# Altium PCB UltiController.PcbDoc
Units mm, origin at the board's own origin, x right, y up, seen from the top; angles counter-clockwise.
Board outline 170 x 47 mm, 2 copper layers (Top Layer, Bottom Layer), stack 1.586 mm thick; 131 components, 59 nets, 326 pads, 147 vias.
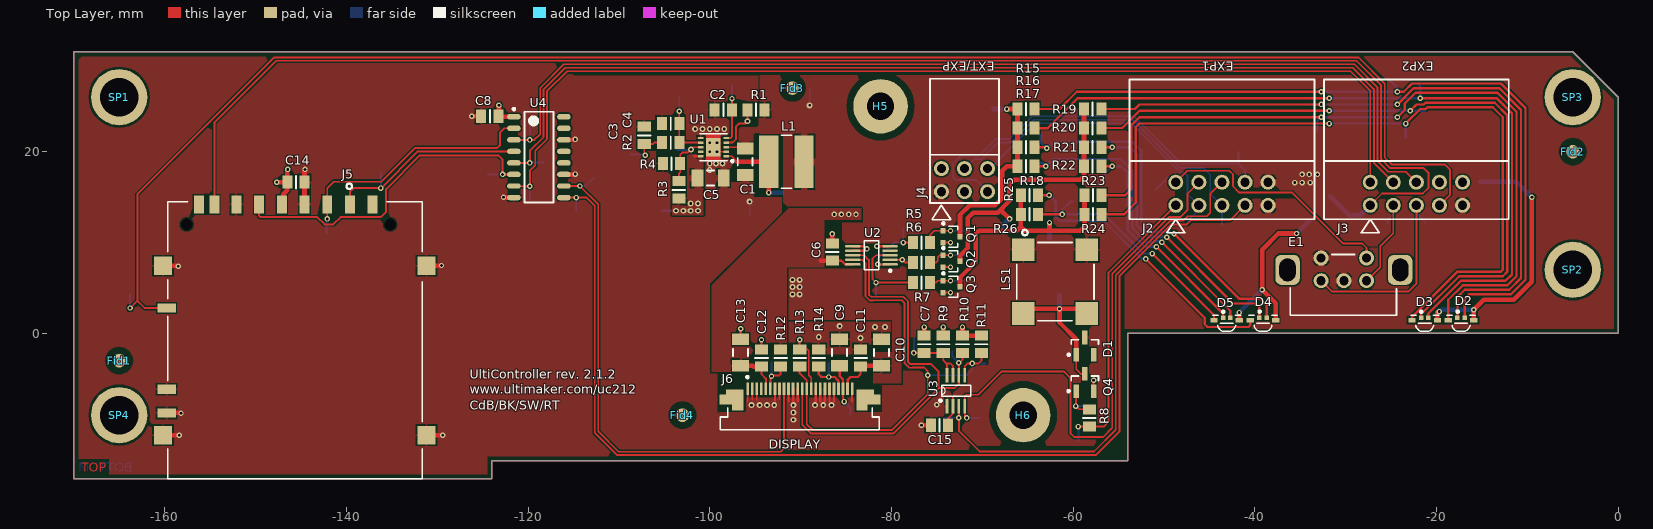
[diagram p0: Top Layer view]
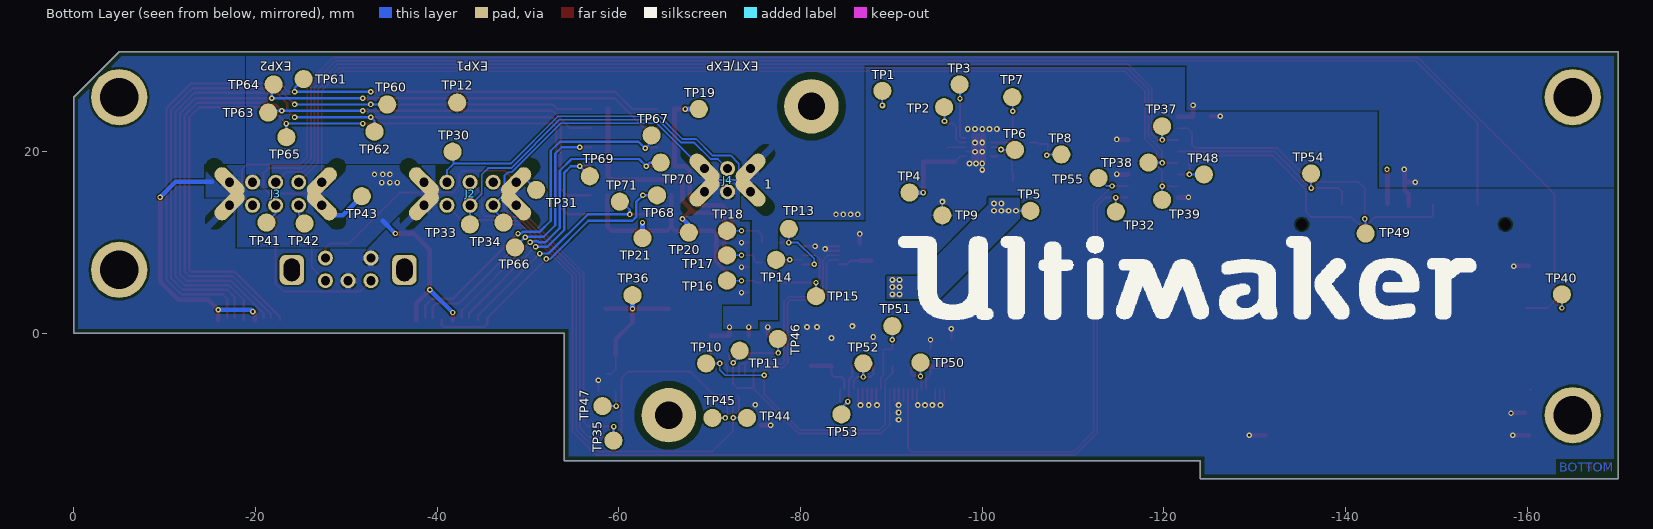
[diagram p1: Bottom Layer view, seen from below]
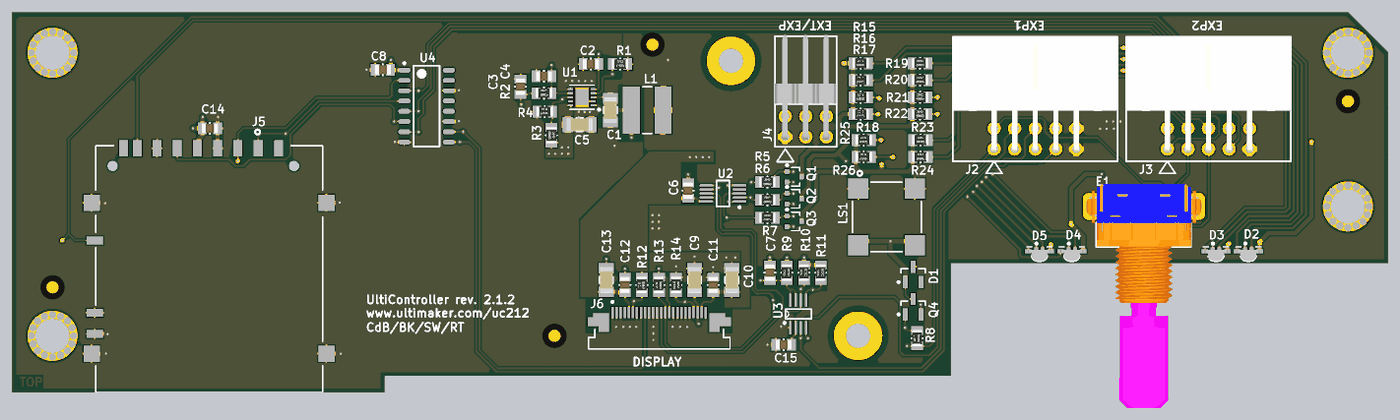
[diagram p2: 3D render of the assembled board from above, using the file's embedded part models]

## Layer stack, top to bottom
Top Layer: signal copper 0.018
Dielectric: core 1.55, FR-4, Dk 4.8
Bottom Layer: signal copper 0.018

## Board outline
-170,-16 -170,31 -5,31 0,26 0,0 -54,0 -54,-14 -124,-14 -124,-16

## Design rules (kind name [scope] priority, off if disabled: settings)
AssemblyTestPointUsage [All] p1 off:
AssemblyTestpoint [All] p1: testpointundercomponent=FALSE minsize=1.016 maxsize=2.54 preferedsize=1.524 minholesize=0 maxholesize=1.016 preferedholesize=0.813 testpointgrid=0.025 usegrid=TRUE gridtolerance=0 allowsidetop=TRUE allowsidebottom=TRUE
Clearance "Clearance spacers" [(InComponent('SP1')) or (InComponent('SP2'))  or (InComponent('SP3')) or (InComponent('SP4'))] p1: gap=0.254
Clearance "Clearance fiduals" [(InComponent('Fid1'))or (InComponent('Fid2'))or  (InComponent('Fid3'))or  (InComponent('Fid4'))] p2: gap=0.762
Clearance "Clearance mounting holes" [(InComponent('H5')) or (InComponent('H6'))] p3: gap=0.762
Clearance Clearance-xPP-xTP-xTT [All] p4: gap=0.178
ComponentClearance [All] p1: gap=0.25 collisioncheckmode=3 verticalgap=0.25 showdistances=FALSE
DiffPairsRouting [All] p1: maxlimit=0.25 minlimit=0.25 mostfreqgap=0.25 maxuncoupledlength=12.5
FabricationTestPointUsage [All] p1 off: valid=0 allowmultiple=FALSE
Height [All] p1: minheight=0 maxheight=25 prefheight=12.5
HoleSize HoleSize-PTH [All] p1: absolutevalues=TRUE maxlimit=4.3 minlimit=0.25 maxpercent=80.000 minpercent=20.000
HoleToHoleClearance [All] p1: gap=0.15 allowstackedmicrovias=TRUE
MinimumAnnularRing "Minimum IAR  >0.45mm" [((ObjectKind = 'Pad') OR (ObjectKind = 'Via')) And (Layer = 'MultiLayer') And (HoleDiameter > AsMM(0.45))] p1: minimumring=0.25 // minimum inner annular ring for pads > 0.45mm finished hole size
MinimumAnnularRing "Minimum IAR <=0.45mm" [((ObjectKind = 'Pad') OR (ObjectKind = 'Via')) And (Layer = 'MultiLayer') And (HoleDiameter <= AsMM(0.45))] p2: minimumring=0.225 // minimum inner annular ring for pads <= 0.45mm finished hole size
MinimumSolderMaskSliver [All] p1: minsoldermaskwidth=0.1
PlaneClearance PlaneClearance-IPI [All] p1: clearance=0.4
PlaneConnect [All] p1: planeconnectstyle=Relief reliefexpansion=0.4 reliefentries=4 reliefconductorwidth=0.2 reliefairgap=0.2
PolygonConnect "PolygonConnect_ReliefConnect 20mil" [(InComponent('L1'))or (InComponent('C1'))or (InComponent('C5')) or (InComponent('J1'))or(InComponent('J2'))or (InComponent('J3'))or (InComponent('J4'))or (InComponent('E1'))] p1: connectstyle=Relief reliefconductorwidth=0.762 reliefentries=4 polygonreliefangle="90 Angle"
PolygonConnect PolygonConnect_Via [IsVia] p2: connectstyle=Direct reliefconductorwidth=0.254 reliefentries=4 polygonreliefangle="90 Angle"
PolygonConnect PolygonConnect-ReliefConnect [All] p3: connectstyle=Relief reliefconductorwidth=0.2 reliefentries=4 polygonreliefangle="90 Angle"
RoomDefinition Sheet2 [InComponentClass('Sheet2')] p1 off: confinementstyle=ConfineIn formatcopy=TRUE lockcomponents=FALSE outline 101.099,3.499 105.799,3.499 105.799,8.399 101.099,8.399
RoomDefinition Sheet1 [InComponentClass('Sheet1')] p2 off: confinementstyle=ConfineIn formatcopy=TRUE lockcomponents=FALSE outline 101.099,3.499 158.099,3.499 158.099,12.599 101.099,12.599
RoutingCorners [All] p1: cornerstyle=45-Degree minsetback=2.5 maxsetback=2.5
RoutingVias [All] p1: holewidth=0.3 width=0.6 viastyle="Through Hole" minholewidth=0.3 minwidth=0.6 maxholewidth=0.3 maxwidth=0.6
SilkToSilkClearance [All] p1: silktosilkclearance=0.2
SilkscreenOverComponentPads [IsPad] p1: minsilkscreentomaskgap=0.2
SolderMaskExpansion [All] p1: expansion=0.1
Width Width-xTW [All] p1: maxlimit=1.5 minlimit=0.15 preferedwidth=0.2
14 further rules are at their usual default settings.

## Classes and differential pairs
component class Sheet2: C7 C8 C9 C10 C11 C12 C13 C14 C15 D1 E1 J2 J3 J4 J5 J6 LS1 Q4 R8 R9 R10 R11 R12 R13 R14 TP30 TP31 TP32 TP33 TP34 TP35 TP36 TP37 TP38 TP39 TP40 TP41 TP42 TP43 TP44 TP45 TP46 TP47 TP48 TP49 TP50 TP51 TP52 TP53 TP54 TP55 U3 U4
component class Sheet1: C1 C2 C3 C4 C5 C6 D2 D3 D4 D5 Fid1 Fid2 Fid3 Fid4 H2 H5 H6 L1 Q1 Q2 Q3 R1 R2 R3 R4 R5 R6 R7 R15 R16 R17 R18 R19 R20 R21 R22 R23 R24 R25 R26 SP1 SP2 SP3 SP4 TP1 TP2 TP3 TP4 TP5 TP6 TP7 TP8 TP9 TP10 TP11 TP12 TP13 TP14 TP15 TP16 TP17 TP18 TP19 TP20 TP21 TP60 TP61 TP62 TP63 TP64 TP65 TP66 TP67 TP68 TP69 TP70 TP71 U1 U2

## Components (designator, comment, footprint, x,y, rotation, side; value= is the part's Value field where it differs from the comment)
C1 "4.7uF" "C1206 (3216)" -96.1,18.9 r90 top
C2 "10nF" "C0805 (2012)" -98.5,24.6 r0 top
C3 "2.2nF" "C0805 (2012)" -107.2,21.8 r270 top
C4 "15pF" "C0805 (2012)" -104.3,23.1 r0 top
C5 "10uF" "C1206 (3216)" -99.9,17.1 r180 top
C6 "100nF" "C0805 (2012)" -86.5,8.95 r90 top
C7 "10nF" "C0805 (2012)" -76.4,-1.2 r270 top
C8 "100nF" "C0805 (2012)" -124.2,23.9 r0 top
C9 "4.7uF" "C1206 (3216)" -85.7,-2.1 r90 top
C10 "10uF" "C1206 (3216)" -81.1,-2.1 r270 top
C11 "100nF" "C0805 (2012)" -83.4,-2.7 r270 top
C12 "100nF" "C0805 (2012)" -94.3,-2.7 r270 top
C13 "4.7uF" "C1206 (3216)" -96.6,-2.1 r90 top
C14 "100nF" "C0805 (2012)" -145.55,16.65 r180 top
C15 "100nF" "C0805 (2012)" -74.7,-10.1 r0 top
D1 "BAS16" "IC SOT23" -58.7,-1.4 r90 top
D2 "LED 598-8810-307F" "LED SMD  598-8810-307F" -17.7,1.7 r180 top
D3 "LED 598-8810-307F" "LED SMD  598-8810-307F" -21.7,1.7 r180 top
D4 "LED 598-8810-307F" "LED SMD  598-8810-307F" -39.5,1.7 r180 top
D5 "LED 598-8810-307F" "LED SMD  598-8810-307F" -43.5,1.7 r180 top
E1 "EC11B15242AE" "MISC EC11B15242AE" -32.7,5.8 r270 top locked
Fid1 "Fiducial" "FIDUCIAL 1,5MM"#1 -162,-3 r180 top
Fid2 "Fiducial" "FIDUCIAL 1,5MM"#2 -5,20 r270 top
Fid3 "Fiducial" "FIDUCIAL 1,5MM"#2 -90.9,27 r270 top
Fid4 "Fiducial" "FIDUCIAL 1,5MM"#2 -103,-9 r270 top
H5 "3mm" "MOUNTING HOLE 3MM PTH" -81.2,25 r90 top
H6 "3mm" "MOUNTING HOLE 3MM PTH" -65.5,-9 r0 top
J2 "10p" "HEADER 10P RIGHT ANGLE" -48.7,14.1 r0 top locked
J3 "10p" "HEADER 10P RIGHT ANGLE" -27.3,14.1 r0 top locked
J4 "6p" "HEADER 6P RIGHT ANGLE" -74.5,15.6 r0 top
J5 "SD Memory Card connector" "CON SD-CARD" -139.6,14.2 r0 top locked
J6 "SFV24R-1STE9LF" "CON SFV24R-1STE9LF" -95.823,-6.1 r0 top
L1 "4.7uH" "INDUCTOR MCSDC0604" -89.6,18.9 r90 top
LS1 "KSSGJ4B20" "BUZZER KSSGJ4B20" -65.5,9.2 r270 top
Q1 "PBSS4140U" "IC SOT323" -74.3,11.3 r180 top
Q2 "PBSS4140U" "IC SOT323" -74.3,8.6 r180 top
Q3 "PBSS4140U" "IC SOT323" -74.3,5.8 r180 top
Q4 "MMBT3904" "IC SOT23" -58.7,-5.4 r90 top
R1 "10K" "R0805 (2012)" -94.9,24.6 r0 top
R2 "46.4K" "R0805 (2012)" -104.3,21 r0 top
R3 "191K" "R0805 (2012)" -103.4,15.8 r270 top
R4 "20.5K" "R0805 (2012)" -104.2,18.7 r0 top
R5 "330E" "R0805 (2012)" -76.7,10 r0 top
R6 "330E" "R0805 (2012)" -76.7,7.8 r0 top
R7 "330E" "R0805 (2012)" -76.7,5.6 r0 top
R8 "330E" "R0805 (2012)" -58.2,-9.3 r90 top
R9 "191K" "R0805 (2012)" -74.3,-1.2 r90 top
R10 "4.7K" "R0805 (2012)" -72.175,-1.2 r90 top
R11 "4.7K" "R0805 (2012)" -70.1,-1.2 r90 top
R12 "10K" "R0805 (2012)" -92.2,-2.7 r90 top
R13 "0E" "R0805 (2012)" -90.1,-2.7 r90 top
R14 "1M" "R0805 (2012)" -88,-2.7 r270 top
R15 "150E" "R0805 (2012)" -65.178,24.697 r0 top
R16 "150E" "R0805 (2012)" -65.178,22.597 r0 top
R17 "150E" "R0805 (2012)" -65.178,20.497 r0 top
R18 "150E" "R0805 (2012)" -65.178,18.397 r0 top
R19 "100E" "R0805 (2012)" -57.85,24.7 r0 top
R20 "100E" "R0805 (2012)" -57.85,22.6 r0 top
R21 "100E" "R0805 (2012)" -57.85,20.5 r0 top
R22 "100E" "R0805 (2012)" -57.85,18.4 r0 top
R23 "100E" "R0805 (2012)" -57.8,15.2 r0 top
R24 "100E" "R0805 (2012)" -57.8,13.1 r0 top
R25 "100E" "R0805 (2012)" -64.8,15.2 r0 top
R26 "100E" "R0805 (2012)" -64.8,13.1 r0 top
SP1 "M3-10ET" "SPACER M3-10ET" -165,26 r0 top locked
SP2 "M3-10ET" "SPACER M3-10ET" -5,7 r0 top locked
SP3 "M3-10ET" "SPACER M3-10ET" -5,26 r0 top locked
SP4 "M3-10ET" "SPACER M3-10ET" -165,-9 r0 top locked
TP1 "2mm" "TESTPOINT 2MM" -89,26.7 r270 bottom
TP2 "2mm" "TESTPOINT 2MM" -95.8,24.9 r90 bottom
TP3 "2mm" "TESTPOINT 2MM" -97.5,27.4 r90 bottom
TP4 "2mm" "TESTPOINT 2MM" -92,15.5 r90 bottom
TP5 "2mm" "TESTPOINT 2MM" -105.3,13.5 r90 bottom
TP6 "2mm" "TESTPOINT 2MM" -103.6,20.2 r90 bottom
TP7 "2mm" "TESTPOINT 2MM" -103.3,26 r90 bottom
TP8 "2mm" "TESTPOINT 2MM" -108.7,19.7 r90 bottom
TP9 "2mm" "TESTPOINT 2MM" -95.6,13 r0 bottom
TP10 "2mm" "TESTPOINT 2MM" -69.6,-3.3 r90 bottom
TP11 "2mm" "TESTPOINT 2MM" -73.3,-1.9 r90 bottom
TP12 "2mm" "TESTPOINT 2MM" -42.2,25.4 r90 bottom
TP13 "2mm" "TESTPOINT 2MM" -78.7,11.5 r90 bottom
TP14 "2mm" "TESTPOINT 2MM" -77.3,8.1 r90 bottom
TP15 "2mm" "TESTPOINT 2MM" -81.7,4.1 r90 bottom
TP16 "2mm" "TESTPOINT 2MM" -71.9,5.8 r90 bottom
TP17 "2mm" "TESTPOINT 2MM" -71.9,8.6 r90 bottom
TP18 "2mm" "TESTPOINT 2MM" -71.9,11.3 r90 bottom
TP19 "2mm" "TESTPOINT 2MM" -68.8,24.7 r90 bottom
TP20 "2mm" "TESTPOINT 2MM" -67.7,11.1 r90 bottom
TP21 "2mm" "TESTPOINT 2MM" -62.6,10.5 r90 bottom
TP30 "2mm" "TESTPOINT 2MM" -41.7,20 r90 bottom
TP31 "2mm" "TESTPOINT 2MM" -50.9,15.8 r0 bottom
TP32 "2mm" "TESTPOINT 2MM" -114.7,13.4 r90 bottom
TP33 "2mm" "TESTPOINT 2MM" -43.6,12 r90 bottom
TP34 "2mm" "TESTPOINT 2MM" -47.3,12.2 r90 bottom
TP35 "2mm" "TESTPOINT 2MM" -59.4,-11.8 r0 bottom
TP36 "2mm" "TESTPOINT 2MM" -61.5,4.2 r90 bottom
TP37 "2mm" "TESTPOINT 2MM" -119.8,22.8 r90 bottom
TP38 "2mm" "TESTPOINT 2MM" -118.3,18.8 r90 bottom
TP39 "2mm" "TESTPOINT 2MM" -119.8,14.7 r90 bottom
TP40 "2mm" "TESTPOINT 2MM" -163.8,4.3 r90 bottom
TP41 "2mm" "TESTPOINT 2MM" -21.2,12.2 r0 bottom
TP42 "2mm" "TESTPOINT 2MM" -25.4,12.1 r0 bottom
TP43 "2mm" "TESTPOINT 2MM" -31.7,15.1 r90 bottom
TP44 "2mm" "TESTPOINT 2MM" -74.1,-9.3 r0 bottom
TP45 "2mm" "TESTPOINT 2MM" -70.3,-9.3 r0 bottom
TP46 "2mm" "TESTPOINT 2MM" -77.5,-0.6 r90 bottom
TP47 "2mm" "TESTPOINT 2MM" -58.2,-8 r90 bottom
TP48 "2mm" "TESTPOINT 2MM" -124.4,17.5 r90 bottom
TP49 "2mm" "TESTPOINT 2MM" -142.2,11 r90 bottom
TP50 "2mm" "TESTPOINT 2MM" -93.2,-3.2 r90 bottom
TP51 "2mm" "TESTPOINT 2MM" -90.1,0.8 r90 bottom
TP52 "2mm" "TESTPOINT 2MM" -86.9,-3.3 r90 bottom
TP53 "2mm" "TESTPOINT 2MM" -84.5,-8.9 r90 bottom
TP54 "2mm" "TESTPOINT 2mm" -136.2,17.6 r270 bottom
TP55 "2mm" "TESTPOINT 2mm" -112.8,17.1 r270 bottom
TP60 "2mm" "TESTPOINT 2mm" -34.5,25.2 r270 bottom
TP61 "2mm" "TESTPOINT 2mm" -25.3,28 r270 bottom
TP62 "2mm" "TESTPOINT 2mm" -33.1,22.2 r270 bottom
TP63 "2mm" "TESTPOINT 2mm" -21.4,24.3 r270 bottom
TP64 "2mm" "TESTPOINT 2mm" -22,27.4 r270 bottom
TP65 "2mm" "TESTPOINT 2mm" -23.4,21.6 r270 bottom
TP66 "2mm" "TESTPOINT 2mm" -48.563,9.463 r270 bottom
TP67 "2mm" "TESTPOINT 2mm" -63.6,21.8 r270 bottom
TP68 "2mm" "TESTPOINT 2mm" -64.2,15.2 r270 bottom
TP69 "2mm" "TESTPOINT 2mm" -56.8,17.3 r270 bottom
TP70 "2mm" "TESTPOINT 2mm" -64.6,18.8 r270 bottom
TP71 "2mm" "TESTPOINT 2mm" -60.1,14.5 r270 bottom
U1 "IC LM4510SD/NOPB" "IC SDA10A" -98.2,19.5 r90 top
U2 "PCA9632DP2" "IC TSSOP-10" -82.2,8.6 r180 top
U3 "PCA9306" "IC SSOP-8" -73.875,-8 r0 top
U4 "74HC4050D" "IC SOIC-16" -118.8,19.4 r0 top

## Footprints (in the part's own frame and the unit in brackets; to place one, negate y for a bottom-side part, rotate by r counter-clockwise, add the part's x,y. Pads: shape width x height; smd on the part's side, far side on the other; paste and mask are expansions set on the pad)
"BUZZER KSSGJ4B20" [mm] "Buzzer KSSGJ4B20 SMD"
  rect 2.5x2.5 smd: 1(0,0) 2(0,7) 3(7,7) 4(7,0)
  silkscreen extent -2.2,-0.7 7.8,7.8, body extent -0.75,-0.7 7.75,7.8, height 3.2
"C0805 (2012)" [mm] "hip Capacitor, 2-Leads, Body 2,0x1.25mm, IPC Medium Density"
  rect 1.1x1.45 smd: 1(-0.95,0) 2(0.95,0)
  silkscreen extent 0,-0.7 0,0.7, body extent -1,-0.6 1,0.6, height 1.19
"C1206 (3216)" [mm] "Chip Capacitor, 2-Leads, Body 3.2x1.6mm, IPC Medium Density"
  rect 1.3x1.85 smd: 1(-1.45,0) 2(1.45,0)
  silkscreen extent -0.4,-0.82 0.4,0.82, body extent -1.6,-0.8 1.6,0.8, height 0.77
"CON SD-CARD" [mm] "Std,reverse SD Memory Card connector SMD"
  round 0 hole 1.3 unplated: 0(-17.975,-2.2) 0(4.425,-2.2)
  rect 1.1x2 smd: 1(0,0) 2(-2.5,0) 3(-5,0) 4(-7.5,0) 5(-10,0) 6(-12.5,0) 7(-14.925,0) 8(-16.625,0) 9(2.5,0)
  rect 2x1 smd: 10(-20.175,-11.4) 11(-20.175,-20.35) 12(-20.175,-22.95)
  rect 2x2 smd: A(8.425,-6.75) B(8.425,-25.4) C(-20.575,-6.75) D(-20.575,-25.4)
  silkscreen extent -20.05,-30.2 7.95,2.3, body extent -20.05,-30.2 7.95,0.3, height 2.9
"CON SFV24R-1STE9LF" [mm] "Connnector SFV24R-1STE9LF 24 pins SMD"
  rect 0.7x1.1 smd: 0(-2.75,-1.15) 0(14.25,-1.15)
  rect 1.95x1.6 smd: 0(-1.43,-0.9) 0(12.93,-0.9)
  rect 1.25x0.7 smd: 0(-1.08,-2.05) 0(12.58,-2.05)
  rect 0.3x1.4 smd: 1(0,0) 2(0.5,0) 3(1,0) 4(1.5,0) 5(2,0) 6(2.5,0) 7(3,0) 8(3.5,0) 9(4,0) 10(4.5,0) 11(5,0) 12(5.5,0) 13(6,0) 14(6.5,0) 15(7,0) 16(7.5,0) 17(8,0) 18(8.5,0) 19(9,0) 20(9.5,0) 21(10,0) 22(10.5,0) 23(11,0) 24(11.5,0)
  silkscreen extent -3,-4.5 14.5,1.42, body extent -3,-4.5 14.5,-0.3, height 1.8
"FIDUCIAL 1,5MM"#1 [mm] "Fiducial 1,5mm"
  round 1.5 smd paste-3 mask+0.75: ""(3,0)
"FIDUCIAL 1,5MM"#2 [mm] "Fiducial 1,5mm"
  round 1.5 smd paste-3 mask+0.75: ""(0,0)
"HEADER 6P RIGHT ANGLE" [mm] "Header 2x3p right angle 2.54mm"
  round 1.65 hole 1.02: 1(0,0) 2(0,2.54) 3(2.54,0) 4(2.54,2.54) 5(5.08,0) 6(5.08,2.54)
  oval 1.65x4 smd far side rot 135 paste-2 mask+0: 1(0,0) 6(5.08,2.54)
  oval 1.65x4 smd far side rot 45 paste-2 mask+0: 2(0,2.54) 5(5.08,0)
  silkscreen extent -1.27,-3.08 6.35,12.44, body extent -1.31,-0.28 6.31,12.6, height 5
"HEADER 10P RIGHT ANGLE" [mm] "Header 2x5p right angle 2.54mm"
  round 1.65 hole 1.02: 1(0,0) 2(0,2.54) 3(2.54,0) 4(2.54,2.54) 5(5.08,0) 6(5.08,2.54) 7(7.62,0) 8(7.62,2.54) 9(10.16,0) 10(10.16,2.54)
  oval 1.65x4 smd far side rot 135 paste-2 mask+0: 1(0,0) 10(10.16,2.54)
  oval 1.65x4 smd far side rot 45 paste-2 mask+0: 2(0,2.54) 9(10.16,0)
  silkscreen extent -5.09,-3.02 15.26,13.86, body extent -5.08,-0.32 15.24,13.86, height 8.8
"IC SDA10A" [mm] "SON- 10-Leads, Body 3x3mm, Pitch 0.5mm"
  rect 0.25x0.6 smd paste+0: 1(0,0) 2(0.5,0) 3(1,0) 4(1.5,0) 5(2,0) 6(2,2.8) 7(1.5,2.8) 8(1,2.8) 9(0.5,2.8) 10(0,2.8)
  rect 2x1.6 smd paste+0: 11(1,1.4)
  silkscreen extent -0.65,-0.83 2.5,2.9, body extent -0.5,-0.1 2.5,2.9, height 0.8
"IC SOIC-16" [mm] "SOIC, 16-Leads, Body 9.9x3.9mm, Pitch 1.27mm, IPC Medium Density"
  oval 1.5x0.6 smd: 1(-2.75,4.445) 2(-2.75,3.175) 3(-2.75,1.905) 4(-2.75,0.635) 5(-2.75,-0.635) 6(-2.75,-1.905) 7(-2.75,-3.175) 8(-2.75,-4.445) 9(2.75,-4.445) 10(2.75,-3.175) 11(2.75,-1.905) 12(2.75,-0.635) 13(2.75,0.635) 14(2.75,1.905) 15(2.75,3.175) 16(2.75,4.445)
  silkscreen extent -2.87,-5 1.6,5.42, body extent -2,-5 2,5, height 1.73
"IC SOT23" [mm] "SOT23, 3-Leads, Body 2.9x1.3mm, Pitch 0.95mm, Lead Span 2.5mm, IPC Medium Density"
  rect 1.5x0.6 smd: 1(-0.95,0.95) 2(-0.95,-0.95) 3(0.95,0)
  silkscreen extent -1.07,-1.5 0.7,1.92, body extent -0.7,-1.5 0.7,1.5, height 1.1
"IC SOT323" [mm] "IC SOT323"
  rect 0.55x0.6 smd paste+0: 1(0,0) 2(0,1.3) 3(-1.85,0.65)
  silkscreen extent -1.6,-0.92 0.1,1.8, body extent -1.6,-0.5 -0.2,1.8, height 1.1
"IC SSOP-8" [mm] "IC SSOP-8 SMD"
  rect 0.3x1.6 smd paste+0: 1(0,0) 2(0.65,0) 3(1.3,0) 4(1.95,0) 5(1.95,3.4) 6(1.3,3.4) 7(0.65,3.4) 8(0,3.4)
  silkscreen extent -0.85,0.48 2.6,2.3, body extent -0.6,0.3 2.6,3.2, height 1.3
"IC TSSOP-10" [mm] "TSSOP, 10-Leads, Body 3x3mm, Pitch 0.5mm, IPC Medium Density"
  oval 1.7x0.3 smd: 1(-2.05,1) 2(-2.05,0.5) 3(-2.05,0) 4(-2.05,-0.5) 5(-2.05,-1) 6(2.05,-1) 7(2.05,-0.5) 8(2.05,0) 9(2.05,0.5) 10(2.05,1)
  silkscreen extent -2.17,-1.6 0.8,1.82, body extent -1.6,-1.6 1.6,1.6, height 1.1
"INDUCTOR MCSDC0604" [mm] "Inductor MCSDC0604"
  rect 5.8x2.1 smd paste+0: 1(0,0) 2(0,3.9)
  silkscreen extent -2.9,1.4 2.9,2.5, body extent -2.9,-1 2.9,4.9, height 1.8
"LED SMD  598-8810-307F" [mm] "LED tricolor SMD"
  rect 0.5x0.5 smd: 1(0,0) 2(-0.8,0)
  rect 0.8x0.5 smd: 3(1,0.25) 4(-1.8,0.25)
  silkscreen extent -1.95,-0.82 1.15,1.48, body extent -2,0.05 1.2,1.46, height 0.99
"MISC EC11B15242AE" [mm] "Misc EC11B15242AE encoder"
  rrect50% 3.3x2.7 hole 1.8 slot 2.5 at 0 deg: 0(-1.2,8.7) 0(-1.2,-3.7)
  round 1.65 hole 1: A(0,0) B(0,5) C(0,2.5) D(-2.5,0) E(-2.5,5)
  silkscreen extent -2.9,-3.4 3.8,8.3, body extent -4,-4.55 23.75,9.55, height 13.79
"MOUNTING HOLE 3MM PTH" [mm] "Mounting Hole 3mm PTH"
  round 6 hole 3: 0(0,0)
"R0805 (2012)" [mm] "hip Resistor, 2-Leads, Body 2,0x1.25mm, IPC Medium Density"
  rect 1.1x1.45 smd: 1(-0.95,0) 2(0.95,0)
  silkscreen extent 0,-0.7 0,0.7, body extent -1,-0.6 1,0.65, height 0.44
"SPACER M3-10ET" [mm] "Spacer M3-10ET"
  round 6.2 hole 4.22: 0(0,0)
"TESTPOINT 2MM" [mm] "TESTPOINT 2mm"
  round 2 smd paste-2 mask+0: 1(0,0)
"TESTPOINT 2mm" [mm] "TESTPOINT 2mm"
  round 2 smd paste-2 mask+0: 1(0,0)

## Part data
C1 C9 C13: library part "Cap 4.7uF X7R 1206", "Cap 4.7uF 1206 X7R 10% 25V"
C2 C7: library part "Cap 10nF X7R 0805", "Cap 10nF X7R 0805 10% 100V"
C3: library part "Cap 2.2nF X7R 0805", "Cap 2.2nF X7R 0805 10% 100V"
C4: library part "Cap 15pF NPO 0805", "Cap 15pF NPO 0805 5% 100V"
C5 C10: library part "Cap 10uF X7R 1206", "Cap 10uF 1206 X7R 10% 25V"
C6 C8 C11 C12 C14 C15: library part "Cap 100nF X7R 0805", "Cap 100nF X7R 0805 10% 100V"
D1: library part "Diode BAS16", "Diode BAS16  SOT23 85V 215MA"
D2 D3 D4 D5: "LED MULTICOLOR RED/GRN/BLUE 1208"
E1: library part "Misc EC11B15242AE", "Misc EC11B15242AE encoder horiz"
H5 H6: "Mounting Hole 3mm PTH"
J2 J3: "Header 2x5p right angle 2.54mm"
J4: "Header 2x3p right angle 2.54mm"
J5: "Connector Std,reverse SD Memory Card connector"
J6: library part "Connector SFV24R-1STE9LF", "Connector FPC/FFC 0.5mm R/A 24p SMD"
L1: library part "Inductor 4.7uH SMD", "Inductor 4.7uH SMD"
LS1: library part "Buzzer KSSGJ4B20", "Buzzer KSSGJ4B20 SMD"
Q1 Q2 Q3: library part "NPN PBSS4140U", "NPN PBSS4140U SOT-323 1A"
Q4: library part "NPN MMBT3904", "NPN MMBT3904 SOT-23 200mA"
R1 R12: library part "Res 10K 0805", "Res 10K 0805 1% 100mW"
R2: library part "Res 46.4K 0805", "Res 46.4K 0805 1% 100mW"
R3 R9: library part "Res 191K 0805", "Res 191K 0805 1% 125mW"
R4: library part "Res 20.5K 0805", "Res 20.5K 0805 1% 100mW"
R5 R6 R7 R8: library part "Res 330E 0805", "Res 330E 0805 1% 100mW"
R10 R11: library part "Res 4.7K 0805", "Res 4.7K 0805 1% 100mW"
R13: library part "Res 0E 0805", "Res 0E 0805 1% 100mW"
R14: library part "Res 1M 0805", "Res 1M 0805 1% 100mW"
R15 R16 R17 R18: library part "Res 150E 0805", "Res 150E 0805 1% 125mW"
R19 R20 R21 R22 R23 R24 R25 R26: library part "Res 100E 0805", "Res 100E 0805 1% 125mW"
SP1 SP2 SP3 SP4: "Spacer SMTSO-M3-10ET"
TP1 TP2 TP3 TP4 TP5 TP6 TP7 TP8 TP9 TP10 TP11 TP12 TP13 TP14 TP15 TP16 TP17 TP18 TP19 TP20 TP21 TP30 TP31 TP32 TP33 TP34 TP35 TP36 TP37 TP38 TP39 TP40 TP41 TP42 TP43 TP44 TP45 TP46 TP47 TP48 TP49 TP50 TP51 TP52 TP53 TP54 TP55 TP60 TP61 TP62 TP63 TP64 TP65 TP66 TP67 TP68 TP69 TP70 TP71: "Testpoint, 2mm, round"
U1: "IC Synchronous Step-Up DC/DC Converter with True Shutdown Isolation, 10-pin LLP, Pb-Free"
U2: library part "IC PCA9632", "IC LED DRIVER RGBA"
U3: library part "IC PCA9306", "IC PCA9306 Voltage Level translator"
U4: library part "IC 74HC4050D", "IC Hex Non-Inverting Buffer/Logic-Level Down Converter"

## Via types
v1: diameter 0.6, hole 0.3, Top Layer to Bottom Layer, tented both sides, 76 vias
v2: diameter 0.65, hole 0.3, Top Layer to Bottom Layer, tented both sides, 40 vias
v3: diameter 0.6, hole 0.3, Top Layer to Bottom Layer, 27 vias
v4: diameter 0.65, hole 0.3, Top Layer to Bottom Layer, 4 vias

## Nets (pads, with @x,y where several pads share a name; then routed paths per layer and width w, separated by ;. In a path a pad name is that pad's centre, name@x,y a point inside that pad or via, vN(x,y) a via of type N, cw(c..) or ccw(c..) an arc to the next point about the centre after c; other vN are vias at no path point)
3.3V: C6.1 C8.2 C12.2 C13.1 C14.2 J3.8 J4.2 J5.4 J6.5 R9.2 R10.2 R11.2 R12.2 TP12.1 U2.10 U4.1 | length 21
  Top Layer w0.203: C12.2 -94.3,-4.5 -93.823,-4.977 J6.5
  Top Layer w0.254: C6.1@-86.45,7.95 C6.1 -85.493,8 -85.093,7.6 U2.10
  Top Layer w0.508: v1(-147.65,16.65) C14.2 ; J5.4@-146.95,14.05 -146.95,15.329 -146.5,15.779 C14.2 ; v1@-146.45,17.95 -146.5,17.9 C14.2 ; v1(-123.2,25.1) -123.2,23.95 C8.2 -123.195,23.845 U4.1 ; C13.1 -95.25,-3.55 -95.15,-3.65 C12.2 ; -87.8,8 C6.1 ; R9.2 v1(-74.3,0.7) ; v1(-72.175,0.7) R10.2 R11.2
  other v1: -86.3,13.1 -85.5,13.1 -84.7,13.1 -83.9,13.1 -146.45,18.05
5V: C1.2 C15.2 D1.3 D2.4 D3.4 D4.4 D5.4 J2.10 J3.10 J4.1 L1.1 LS1.1 LS1.2 R1.2 TP1.1 U1.3 U3.2 | length 56.6
  Top Layer w0.203: U1.3 -96.25,20.5 C1.2 ; C15.2 -73.75,-9.35 -73.225,-8.825 U3.2 -73.225,-7.025 -73,-6.8
  Top Layer w0.508: D5.4 v3(-41.7,2.3) ; D4.4 -37.7,3.3 v3(-39.2,4.8) -39.2,9.2 -37.4,11 v1(-35.4,11) ; D3.4 -19.9,2.3 -19.8,2.4 v3(-19.7,2.4) ; D2.4 v3(-15.9,2.6) -14.8,3.7 -11.5,3.7 -9.5,5.7 v3(-9.5,15)
  Bottom Layer w0.2: v2(-89,25.1) TP1.1@-89,26.9
  Bottom Layer w0.508: v3(-41.7,2.3) v3(-39.2,4.8) ; v1(-35.4,11) -34,12.4 ; v3(-19.7,2.4) -19.8,2.4 -19.6,2.6 v3(-15.9,2.6) ; -15.2,16.7 -11.2,16.7 v3(-9.5,15)
  other v1: -35.6,16.6 -34.8,16.6 -33.9,16.6 -34.8,17.5 -34,17.5 -33.1,17.5
13V: C5.2 C10.2 C11.2 J6.23 R3.2 TP5.1 U1.10 | length 8.1
  Top Layer w0.254: -101.7,19.5 U1.10 ; J6.23 -84.823,-5.123 -84.5,-4.8 -83.7,-4.8 -83.4,-4.5 C11.2
  Top Layer w0.508: C11.2 -83.3,-3.55 C10.2
  Bottom Layer w0.254: TP5.1 v2(-103.7,13.5)
  other v2: -90.9,4.3 -90.1,4.3 -90.9,5.1 -90.1,5.1 -90.9,5.9 -90.1,5.9 -102.9,13.5 -102.1,13.5 -101.3,13.5 -102.1,14.3 -101.3,14.3
BLUE1: D2.3 R23.2 TP62.1 | length 86.4
  Top Layer w0.254: R23.2 -54.3,15.2 -53.6,15.9 -53.6,22.9 -52.7,23.8 v3(-32.7,23.8) ; v3(-24.3,23.8) -23.5,24.6 -23.5,25.3 -22.295,26.505 -13.305,26.505 -11.2,24.4 -11.2,6.3 -12.2,5.3 -17.1,5.3 -18.7,3.7 D2.3
  Bottom Layer w0.254: TP62.1 -33.1,23.4 v3(-32.7,23.8) v3(-24.3,23.8)
BLUE2: D3.3 R24.2 TP65.1 | length 85.2
  Top Layer w0.254: R24.2 -54.4,13.1 -53.1,14.4 -53.1,22.7 -52.7,23.1 v3(-31.8,23.1) ; v3(-23.4,23.1) -21.8,24.7 -21.2,24.7 -21,24.9 -13.8,24.9 -12.7,23.8 -12.7,7 -12.9,6.8 -17.7,6.8 -22.7,1.8 D3.3
  Bottom Layer w0.254: v3(-31.8,23.1) v3(-23.4,23.1) TP65.1
BLUE3: D4.3 R25.2 TP68.1 | length 32.9
  Top Layer w0.254: R25.2 v3(-62.65,15.2) ; v1(-52,8.2) -45.5,1.7 -45.5,1 -45.2,0.7 -40.7,0.7 -40.5,0.9 D4.3
  Bottom Layer w0.254: TP68.1 v3(-62.65,15.2) -61.9,14.45 -61.9,12.8 -61.5,12.4 -56.639,12.4 -52.439,8.2 v1(-52,8.2)
BLUE4: D5.3 R26.2 TP71.1 | length 26.5
  Top Layer w0.254: R26.2 v3(-61.2,13.1) ; v1(-51.291,8.791) -44.5,2 D5.3
  Bottom Layer w0.254: TP71.1 -60.3,14.5 -61.2,13.6 v3(-61.2,13.1) -56.574,13.1 -52.265,8.791 -52.251,8.805 -51.305,8.805 v1(-51.291,8.791)
GND: C1.1 C2.1 C3.1 C4.1 C5.1 C6.2 C7.1 C8.1 C9.2 C10.1 C11.1 C12.1 C13.2 C14.1 C15.1 E1.C E1.D J2.9 J3.9 J4.3 J5.3 J5.6 J5.11 J5.12 J5.A J5.B J5.C J5.D J6.1 J6.2 J6.3 J6.7 J6.8 J6.10 J6.11 J6.12 J6.16 J6.17 J6.18 J6.19 J6.20 J6.24 Q1.2 Q2.2 Q3.2 Q4.2 R4.1 R14.1 TP9.1 U1.2 U1.6 U1.11 U2.5 U2.6 U2.7 U3.1 U4.8 U4.11 U4.14 | length 51.5
  Top Layer w0.203: U1.11@-99.1,20 U1.2 ; C13.2 v1(-96.6,0.5) ; -95.823,-7.477 J6.1 ; -95.323,-7.277 J6.2 ; -94.823,-7.323 J6.3 ; C12.1 v1(-94.3,-0.7) ; -92.823,-7.416 J6.7 ; -92.323,-7.223 J6.8 ; -84.323,-7.5 J6.24 ; Q3.2 v1(-73.5,4.5) ; Q2.2 v1(-73.5,7.3) ; Q1.2 v1(-73.5,10) ; Q4.2 v1(-57.75,-5.15)
  Top Layer w0.254: J5.11@-160.375,-6.15 J5.11@-160.325,-6.2 ; J5.12@-158.85,-8.75 J5.12@-158.8,-8.8 ; -91.323,-7.477 J6.10 ; -90.823,-7.477 J6.11 ; -90.323,-7.477 J6.12 ; -88.323,-7.477 J6.16 ; -87.823,-7.477 J6.17 ; -87.323,-7.477 J6.18 ; -86.823,-7.477 J6.19 ; -86.323,-7.477 J6.20 ; U2.7 -82.9,9.1 v1(-82.7,9.3) -83,9.6 U2.6 ; v1(-81.6,9.6) U2.5
  Top Layer w0.508: J5.D v1(-158.4,-11.2) ; J5.C -158.55,7.45 v1(-158.5,7.4) ; J5.12 v1@-158.25,-8.75 ; J5.3 C14.1 -144.6,17.8 v1@-144.55,17.85 ; J5.B v1(-129.4,-11.2) ; J5.A v1@-129.65,7.45 ; v1(-126.2,23.9) C8.1 ; v1(-122.7,15) -122.655,14.955 U4.8 ; U4.11 -114.845,17.495 v1(-114.8,17.54) ; U4.14 -114.845,21.305 v1(-114.8,21.35) ; C6.2 v1(-86.5,10.95) ; v1(-76.7,-10.1) C15.1 ; C7.1 v1(-76.4,0.7)
  Bottom Layer w0.203: TP9.1 v2(-95.6,14.5)
  other v1: -158.2,-8.8 -75.007,-7.857 -129.525,7.475 -144.55,18.05
  other v2: -90.8,-9.5 -90.8,-8.7 -95.4,-7.9 -94.5,-7.9 -93.7,-7.9 -92.9,-7.9 -90.8,-7.9 -88.4,-7.9 -87.5,-7.9 -86.6,-7.9 -83.4,-0.5 -88,-0.4 -81.8,0.7 -80.7,0.7 -85.7,0.8 -100,18 -100,18.7 -99.3,18.7 -98.6,18.7 -101.6,22.5 -100.8,22.5 -100,22.5 -99.2,22.5 -98.4,22.5
  other v4: -100,20 -99.2,20 -100,21 -99.2,21
GREEN1: D2.1 R19.2 TP60.1 | length 78.6
  Top Layer w0.254: R19.2 -53.2,24.7 -52.7,25.2 v3(-32.7,25.2) ; v3(-24.3,25.2) -22.5,27 -13.1,27 -10.7,24.6 -10.7,6.1 -12,4.8 -16.9,4.8 -17.7,4 D2.1
  Bottom Layer w0.254: TP60.1 v3(-32.7,25.2) v3(-24.3,25.2)
GREEN2: D3.1 R20.2 TP63.1 | length 77.1
  Top Layer w0.254: R20.2 -54.6,22.6 -52.7,24.5 v3(-31.8,24.5) ; v3(-22.9,24.5) -22.2,25.2 -21.4,25.2 -21.2,25.4 -13.6,25.4 -12.2,24 -12.2,6.8 -12.7,6.3 -17.5,6.3 -21.7,2.1 D3.1
  Bottom Layer w0.254: v3(-31.8,24.5) v3(-22.9,24.5) TP63.1@-21.3,24.5
GREEN3: D4.1 R21.2 TP66.1 | length 32.6
  Top Layer w0.254: R21.2 v3(-55.7,20.5) ; v1(-49.7,10.6) -42.4,3.3 -39.9,3.3 -39.5,2.9 D4.1
  Bottom Layer w0.254: v3(-55.7,20.5) -53.7,20.5 -53,19.8 -53,11.9 -51.73,10.63 -49.73,10.63 v1(-49.7,10.6) -48.3,9.2 TP66.1@-48.2,9.2
GREEN4: D5.1 R22.2 TP69.1 | length 25.9
  Top Layer w0.254: R22.2 v3(-55.7,18.4) ; v1(-50.831,9.531) -43.5,2.2 D5.1
  Bottom Layer w0.254: TP69.1 v3(-55.7,18.4) -54.7,18.4 -54,17.7 -54,11.4 -52.131,9.531 v1(-50.831,9.531)
J2_PIN5: J2.5 J4.4 TP33.1 | length 37.8
  Bottom Layer w0.203: J4.4 -70.9,19.2 -70.1,19.2 -68.3,21 -66.861,21 -64.342,23.519 -53.458,23.519 -48.139,18.2 -45.606,18.2 -44.9,17.494 -44.9,15.38 J2.5 -43.6,14.08 TP33.1
MISO: J3.1 J5.7 TP43.1 | length 170.7
  Top Layer w0.203: J5.7 -154.525,23.175 -147.693,30.007 -28.807,30.007 -26.1,27.3 -26.1,19.2 -25.1,18.2 -21.4,18.2 -20.9,17.7 -20.9,16 -21.5,15.4 -26,15.4 J3.1@-27.3,14.1
  Bottom Layer w0.203: J3.1@-28,14.1 -27.3,14.1 J3.1@-27.349,14.149
  Bottom Layer w0.508: TP43.1 -29.6,13 -28.4,13 J3.1@-27.3,14.1
MOSI: J3.6 TP37.1 U4.3 | length 117.4
  Top Layer w0.203: U4.3 -121.545,21.3 v1(-119.8,21.3) -119.3,21.3 -118.662,21.938 -118.662,27.016 -116.052,29.626 -29.026,29.626 -26.5,27.1 -26.5,19 -25.3,17.8 -23.38,17.8 J3.6
  Bottom Layer w0.203: v1(-119.8,21.3) TP37.1
NetC2_2: C2.2 TP3.1 U1.5 | length 6.4
  Top Layer w0.203: U1.5 -97.7,21.5 -97.553,21.647 -97.553,24.597 C2.2 v1(-97.55,25.85)
  Bottom Layer w0.203: v1(-97.55,25.85) TP3.1@-97.55,27.35
NetC3_2: C3.2 R2.1 TP8.1 | length 4.7
  Top Layer w0.203: v1@-107.2,19.7 C3.2 -106.25,20.85 -106.1,21 R2.1
  Bottom Layer w0.203: TP8.1 v1@-107.2,19.7
  other v1: -107.1,19.6
NetC4_2: C4.2 R2.2 TP7.1 U1.7 | length 7.4
  Top Layer w0.203: v1(-103.35,24.45) C4.2 R2.2 U1.7
  Bottom Layer w0.203: v1(-103.35,24.45) -103.35,25.95 TP7.1
NetC7_2: C7.2 R9.1 TP46.1 U3.7 U3.8 | length 9.2
  Top Layer w0.203: v1(-77.55,-2.15) C7.2 R9.1 -74.3,-2.975 -73.975,-3.3 -73.5,-3.3 -73.225,-3.575 U3.7 ; U3.8 -73.875,-3.4
  Bottom Layer w0.203: v1(-77.55,-2.15) -77.5,-2.1 TP46.1
NetC9_1: C9.1 J6.22 TP53.1 | length 5.8
  Top Layer w0.254: C9.1 -85.7,-4.7 -85.323,-5.077 J6.22 -85.323,-7.377 v1(-85.2,-7.5)
  Bottom Layer w0.254: v1(-85.2,-7.5) -84.5,-8.2 TP53.1
NetD1_1: D1.1 LS1.3 LS1.4 Q4.3 TP36.1 | length 17.1
  Top Layer w0.203: D1.1 -59.65,-3.95 -59.15,-4.45 Q4.3
  Top Layer w0.508: LS1.4@-65.5,2.7 v1(-61.5,2.7) ; D1.1 -59.65,-0.65 -61.5,1.2 v1(-61.5,2.7) ; LS1.3@-58.5,2.7 v1(-61.5,2.7)
  Bottom Layer w0.508: v1(-61.5,2.7) TP36.1
NetJ2_1: J2.1 R8.1 TP35.1 | length 32
  Top Layer w0.203: v1(-59.45,-10.25) R8.1 -56.65,-10.25 -56.106,-9.706 -56.106,6.694 J2.1@-48.7,14.1
  Bottom Layer w0.203: v1(-59.45,-10.25) -59.4,-10.3 TP35.1
NetJ2_3: J2.3 J4.6 TP34.1 | length 32.6
  Bottom Layer w0.203: J4.6@-69.42,18.14 -69.182,18.14 -64.184,23.138 -53.616,23.138 -48.224,17.747 -47.806,17.747 -47.4,17.341 -47.4,15.34 J2.3 -46.16,13.64 -47.3,12.5 TP34.1
NetJ2_8: J2.8 J4.5 TP30.1 | length 45.4
  Bottom Layer w0.203: J4.5@-69.42,15.6 -70.72,16.9 -72.9,16.9 -73.2,17.2 -73.2,18.7 -72.3,19.6 -70.3,19.6 -68.5,21.4 -67,21.4 -64.5,23.9 -53.3,23.9 -48.1,18.7 -41.8,18.7 ; TP30.1 -41.8,19.9 -41.8,18.7 ; J2.8 -41.08,17.98 -41.8,18.7
NetJ5_1: J5.1 TP54.1 U4.4 | length 22.9
  Top Layer w0.203: J5.1 -139.6,15.6 -139.2,16 v1(-136.2,16) -136.161,16 -132.126,20.035 U4.4
  Bottom Layer w0.203: v1(-136.2,16) TP54.1
NetJ5_2: J5.2 TP49.1 U4.2 | length 29.1
  Top Layer w0.203: v3(-142.1,12.6) J5.2 -142.1,16 -141.4,16.7 -136.147,16.7 -132.431,20.416 -123.384,20.416 -123.1,20.7 -123.1,22.1 -122.625,22.575 U4.2
  Bottom Layer w0.203: TP49.1 -142.2,12.5 v3(-142.1,12.6)
NetJ5_5: J5.5 TP48.1 U4.6 | length 37.7
  Top Layer w0.203: J5.5 -149.6,12.9 -149.5,12.8 -143.2,12.8 -142.4,12 -141.435,12 -140.635,12.8 -136.2,12.8 -135.621,13.379 -135.621,15.879 -131.9,19.6 -123.3,19.6 -122.8,19.1 v1(-122.8,17.5) -122.795,17.495 U4.6
  Bottom Layer w0.203: TP48.1 v1(-122.8,17.5)
NetJ6_6: J6.6 R12.1 TP50.1 | length 4.8
  Top Layer w0.203: J6.6 -93.323,-4.923 -93.03,-4.63 -92.33,-4.63 -92.2,-4.5 R12.1
  Bottom Layer w0.203: v1(-93.2,-4.7) TP50.1
NetJ6_9: J6.9 TP55.1 U4.10 | length 59.5
  Top Layer w0.203: U4.10 v1(-114.286,16.225) -112.269,14.208 -112.269,-10.792 -110.042,-13.019 -92.2,-13.019 -91.823,-12.642 J6.9
  Bottom Layer w0.203: v1(-114.286,16.225) -113.675,16.225 TP55.1
NetJ6_13: J6.13 R10.1 TP11.1 U2.8 U3.6 | length 51.8
  Top Layer w0.203: J6.13 -89.823,-10.077 -88.9,-11 -79.761,-11 -74.8,-6.039 -74.8,-6 ; U2.8 -83,8.6 -82.472,8.072 -82.472,4.272 -82.228,4.028 -78.688,4.028 -78.172,3.512 -78.172,-3.128 -77.928,-3.372 -75.628,-3.372 -74.8,-4.2 -74.8,-6 ; R10.1 -72.175,-2.875 -72.525,-3.225 v1(-72.575,-3.225) U3.6 -72.575,-5.575 -73,-6 -74.8,-6
  Bottom Layer w0.203: TP11.1 -73.3,-2.5 v1(-72.575,-3.225)
NetJ6_14: J6.14 R11.1 R13.1 TP10.1 U2.9 U3.5 | length 55
  Top Layer w0.203: R13.1 -90.1,-4.4 -89.323,-5.177 J6.14 -89.323,-9.977 -88.681,-10.619 -79.918,-10.619 -76,-6.701 v1(-76,-4.6) -76,-4.153 -76.4,-3.753 -77.714,-3.753 -77.742,-3.781 -78.058,-3.781 -78.553,-3.286 -78.553,3.314 -78.886,3.647 -82.014,3.647 -82.042,3.619 -82.358,3.619 -82.853,4.114 -82.853,6.5 -82.853,7.753 -83.2,8.1 U2.9 ; U3.5 -71.925,-3.625 -71.6,-3.3 v1(-71.1,-3.3) -70.4,-3.3 -70.1,-3 R11.1
  Bottom Layer w0.203: v1(-76,-4.6) -71.7,-4.6 -71.1,-4 v1(-71.1,-3.3) TP10.1
NetJ6_15: J6.15 R13.2 TP51.1 | length 7.9
  Top Layer w0.203: v1(-90.1,-0.7) R13.2 -89.25,-1.75 -89.1,-1.9 -89.1,-2.98 -89.096,-2.984 -89.096,-4.316 -89.1,-4.32 -89.1,-4.6 -88.823,-4.877 J6.15
  Bottom Layer w0.203: v1(-90.1,-0.7) TP51.1
NetJ6_21: J6.21 R14.2 TP52.1 | length 5.7
  Top Layer w0.254: R14.2 -88,-4.5 -87.7,-4.8 v1(-86.9,-4.8) -86.246,-4.8 -85.823,-5.223 J6.21
  Bottom Layer w0.254: v1(-86.9,-4.8) TP52.1
NetL1_2: L1.2 TP4.1 U1.1 | length 9.8
  Top Layer w0.203: U1.1 -97.6,19.5 -97,18.9
  Top Layer w0.508: -97,18.9 L1.2 v1(-93.5,15.5)
  Bottom Layer w0.508: v1(-93.5,15.5) TP4.1
NetQ1_1: Q1.1 R5.2 TP18.1 | length 4.9
  Top Layer w0.203: R5.2 -75.75,10.85 -75.3,11.3 Q1.1 v1(-73.5,11.3)
  Bottom Layer w0.203: v1(-73.5,11.3) TP18.1
NetQ1_3: Q1.3 R15.1 R16.1 R17.1 R18.1 TP19.1 | length 21.7
  Top Layer w0.508: Q1.3 -72.45,13.05 -71.4,14.1 -68.6,14.1 -67.8,14.9 -67.8,17.9 -67.303,18.397 R18.1 R17.1 R16.1 R15.1 v3(-67.297,24.697)
  Bottom Layer w0.508: TP19.1 -68.797,24.697 v3(-67.297,24.697)
NetQ2_1: Q2.1 R6.2 TP17.1 | length 4.4
  Top Layer w0.203: R6.2 -75.1,7.8 -74.9,8 -74.9,8.4 -74.7,8.6 Q2.1 v1(-73.5,8.6)
  Bottom Layer w0.203: v1(-73.5,8.6) TP17.1
NetQ2_3: Q2.3 R19.1 R20.1 R21.1 R22.1 TP20.1 | length 31.5
  Top Layer w0.508: Q2.3 -72.45,8.556 -71.6,9.406 -71.6,12.7 -71,13.3 -68.3,13.3 -67,14.6 -67,16.4 -66.5,16.9 -59.2,16.9 -58.8,17.3 R22.1 R21.1 R20.1 R19.1 ; -68,13.6 v1(-67,12.6)
  Bottom Layer w0.508: TP20.1 -67.7,11.946 -67.046,12.6 v1(-67,12.6)
NetQ3_1: Q3.1 R7.2 TP16.1 | length 3.9
  Top Layer w0.203: R7.2 -75.1,5.6 -74.9,5.8 Q3.1 v1(-73.5,5.8)
  Bottom Layer w0.203: v1(-73.5,5.8) TP16.1
NetQ3_3: Q3.3 R23.1 R24.1 R25.1 R26.1 TP21.1 | length 28.7
  Top Layer w0.508: Q3.3 -72.45,6.15 -70.7,7.9 -70.7,11 -70.4,11.3 -66.2,11.3 -65.75,11.75 ; R25.1 R26.1 -65.75,11.75 ; v3(-62.6,12.2) -62.6,12 -62.6,11.3 ; R23.1 R24.1 -58.75,11.75 -59.2,11.3 -62.6,11.3 ; -65.75,11.75 -65.3,11.3 -62.6,11.3
  Bottom Layer w0.508: TP21.1 -62.6,12 v3(-62.6,12.2)
NetQ4_1: Q4.1 R8.2 TP47.1 | length 4.8
  Top Layer w0.203: Q4.1 -59.65,-7.25 -59.7,-7.3 v1(-59.7,-8) -59.35,-8.35 R8.2
  Bottom Layer w0.203: v1(-59.7,-8) TP47.1
NetR1_1: R1.1 TP2.1 U1.4 | length 7
  Top Layer w0.203: U1.4 -97.5,21 -97.1,21.4 -97.1,22.8 -96.8,23.1 -96.1,23.1 v2(-95.85,23.35) R1.1
  Bottom Layer w0.203: v2(-95.85,23.35) TP2.1@-95.85,24.85 ; TP2.1@-95.85,25.05 TP2.1@-95.8,25.1
NetR3_1: R3.1 R4.2 TP6.1 U1.8 | length 7.1
  Top Layer w0.203: R3.1 -103.4,17.6 -103.25,17.75 R4.2 -103.25,19.65 -103,19.9 -102.4,19.9 v2(-102.051,20.249) -101.8,20.5 U1.8
  Bottom Layer w0.203: TP6.1 -102.1,20.2 v2(-102.051,20.249)
NetR5_1: R5.1 TP13.1 U2.1 | length 8
  Top Layer w0.203: v1(-81.5,7.6) U2.1 ; v1(-78.7,10) R5.1
  Bottom Layer w0.203: v1(-81.5,7.6) -81.5,8.2 -79.7,10 v1(-78.7,10) TP13.1
NetR6_1: R6.1 TP14.1 U2.2 | length 4.1
  Top Layer w0.203: U2.2 v1(-78.8,8.1) -78.5,7.8 R6.1
  Bottom Layer w0.203: v1(-78.8,8.1) TP14.1
NetR7_1: R7.1 TP15.1 U2.3 | length 10.4
  Top Layer w0.203: U2.3 -81.7,8.6 -82.091,8.209 -82.091,5.991 v1(-81.7,5.6) R7.1
  Bottom Layer w0.203: TP15.1 v1(-81.7,5.6)
RED1: D2.2 R15.2 TP61.1 | length 86.7
  Top Layer w0.254: R15.2 -61.503,24.697 -59.6,26.6 v3(-32.7,26.6) ; v3(-24.3,26.6) -23.6,26.6 -22.7,27.5 -12.9,27.5 -10.2,24.8 -10.2,5.9 -11.8,4.3 -16.4,4.3 -16.9,3.8 D2.2
  Bottom Layer w0.254: v3(-32.7,26.6) v3(-24.3,26.6) ; TP61.1 -24.3,27 v3(-24.3,26.6)
RED2: D3.2 R16.2 TP64.1 | length 85.4
  Top Layer w0.254: R16.2 -62.803,22.597 -59.5,25.9 v3(-31.8,25.9) ; v3(-21.8,25.9) -13.4,25.9 -11.7,24.2 -11.7,6.5 -12.4,5.8 -17.3,5.8 -20.9,2.2 D3.2
  Bottom Layer w0.254: v3(-31.8,25.9) v3(-21.8,25.9) -21.8,27.2 TP64.1
RED3: D4.2 R17.2 TP67.1 | length 40.9
  Top Layer w0.254: R17.2 -63.028,20.497 v3(-62.9,20.369) ; v1(-48.895,10.995) -41.7,3.8 -39.4,3.8 -38.7,3.1 D4.2
  Bottom Layer w0.254: TP67.1 -63.6,21.069 -63.028,20.497 -62.764,20.497 -62.157,21.105 -53.505,21.105 -52.5,20.1 -52.5,15.718 ; -52.5,15.717 -52.5,12.4 -51.305,11.205 -49.449,11.205 -49.239,10.995 v1(-48.895,10.995)
RED4: D5.2 R18.2 TP70.1 | length 35.1
  Top Layer w0.254: R18.2 v3(-63.028,18.397) ; v1(-50.225,10.025) -42.7,2.5 D5.2
  Bottom Layer w0.254: TP70.1 -63.431,18.8 v3(-63.028,18.397) -62.225,19.2 -54.8,19.2 -53.5,17.9 -53.5,11.6 -51.925,10.025 -51.191,10.025 -51.081,10.135 -50.58,10.135 -50.47,10.025 v1(-50.225,10.025)
RESET: J2.7 TP32.1 U4.9 | length 124.3
  Top Layer w0.203: U4.9 v1(-114.7,14.955) -113.555,14.955 -112.65,14.05 -112.65,-10.95 -110.2,-13.4 -57.501,-13.4 -54.9,-10.799 -54.9,6.284 -49.184,12 -47.5,12 -47.024,12.476 -42.704,12.476 J2.7
  Bottom Layer w0.203: TP32.1 v1(-114.7,14.955)
S_E1: E1.B J3.3 TP42.1 | length 11.8
  Top Layer w0.203: E1.B -26.2,7.3 -26.2,9.6 -24.76,11.04 J3.3
  Bottom Layer w0.203: TP42.1 -25.4,12.46 -24.76,13.1 J3.3
S_E2: E1.A J3.5 TP41.1 | length 22.3
  Top Layer w0.203: E1.A -31.5,4.6 -23.1,4.6 -22.2,5.5 -22.2,14.08 J3.5
  Bottom Layer w0.203: J3.5 -22.22,13.22 -22.02,13.02 TP41.1
S_EC: E1.E J2.2 TP31.1 | length 28.8
  Top Layer w0.203: J2.2@-48.7,16.64 -47.44,17.9 -42.8,17.9 -42.4,17.5 -42.4,16.2 -41.7,15.5 -35.9,15.5 -30.3,9.9 -28.2,9.9 -27.7,9.4 E1.E
  Bottom Layer w0.203: TP31.1 J2.2@-49.565,17.135
SCK: J3.2 TP39.1 U4.7 | length 117
  Top Layer w0.203: U4.7 -121.525,16.2 v1(-119.8,16.2) -119.8,17.9 -119.2,18.5 -119.2,20.1 -117.9,21.4 -117.9,26.7 -117.861,26.7 -115.697,28.864 -29.47,28.864 -27.3,26.694 J3.2@-27.3,16.64
  Bottom Layer w0.203: TP39.1 v1(-119.8,16.2)
SCL5: J2.6 TP44.1 U3.3 | length 57.6
  Top Layer w0.203: U3.3 v1(-72.575,-9.275) -72.575,-10.725 -70.3,-13 -57.7,-13 -55.3,-10.6 -55.3,6.422 -49.322,12.4 -47.9,12.4 -47.4,12.9 -45.3,12.9 -44.9,13.3 -44.9,15.36 J2.6
  Bottom Layer w0.203: TP44.1 -74.075,-9.275 v1(-72.575,-9.275)
SD_CARDDETECT: J3.7 J5.10 TP40.1 | length 182.9
  Top Layer w0.203: v3(-163.8,2.8) -163,3.6 ; J5.10 -162.2,2.8 -163,3.6 ; J3.7 -18.5,15.28 -18.5,18 -19.1,18.6 -24.937,18.6 -25.7,19.363 -25.7,27.5 -28.588,30.388 -147.912,30.388 -163,15.3 -163,3.6
  Bottom Layer w0.203: v3(-163.8,2.8) TP40.1
SDA5: J2.4 TP45.1 U3.4 | length 60.1
  Top Layer w0.203: v1(-71.7,-9.3) -71.8,-9.3 -71.925,-9.175 U3.4 -71.925,-6.925 -71.746,-6.746 -70.446,-6.746 -67.9,-4.2 -61,-4.2 -60.3,-4.9 -60.3,-11 -59.9,-11.4 -56.7,-11.4 -55.7,-10.4 -55.7,6.561 -49.461,12.8 -48.215,12.8 -47.734,13.281 -47.719,13.281 -47.4,13.6 -47.4,15.4 J2.4 J2.4@-46.04,16.64
  Bottom Layer w0.203: v1(-71.7,-9.3) TP45.1
SS: J3.4 TP38.1 U4.5 | length 116.5
  Top Layer w0.203: U4.5 v1(-119.8,18.765) -119.8,20.1 -118.281,21.619 -118.281,26.858 -115.894,29.245 -29.245,29.245 -26.9,26.9 -26.9,18.78 J3.4
  Bottom Layer w0.203: v1(-119.8,18.765) -119.765,18.8 TP38.1
pads on no net: D1.2 E1.0 Fid1. Fid2. Fid3. Fid4. H5.0 H6.0 J5.0 J5.8 J5.9 J6.0 J6.4 SP1.0 SP2.0 SP3.0 SP4.0 U1.9 U2.4 U4.12 U4.13 U4.15 U4.16
copper on no net: | length 862.1
  Top Layer w0.15: -170,-16 -124,-16 -124,-14 -54,-14 -54,0 0,0 0,26 -5,31 -170,31 -170,-16
  Bottom Layer w0.15: -170,-16 -124,-16 -124,-14 -54,-14 -54,0 0,0 0,26 -5,31 -170,31 -170,-16

## Polygon pours and split planes (outlines as drawn)
GND on Top Layer "Top Layer-No Net" (solid, pour order 24): -54.3,6.4 -48.9,11.8 -47.2,11.8 -47.2,11.799 -46.9,12.099 -43.2,12.099 -40.5,14.799 -35.6,14.8 -30.4,9.6 -26.2,9.6 -24.76,11.04 -24.8,18.899 -25.4,19.499 -25.4,27.799 -28.1,30.498 -5.2,30.5 -0.5,25.7 -0.5,0.5 -54.3,0.5
5V on Top Layer "Top Layer-No Net" (solid, pour order 23): -25.798,9.599 -25.698,9.599 -24.76,11.04 -24.7,15.1 -25.7,16 -25.7,27.4 -26.7,28.4 -94.5,28.4 -94.5,22 -91.9,22 -91.9,13.9 -83.1,13.9 -83.1,12.2 -85.4,12.2 -85.4,9.9 -79.1,9.9 -79.1,7.1 -82.5,7.1 -82.5,3.9 -78.2,3.9 -78.2,-0.4 -69.3,-0.4 -69.3,-3.5 -74.3,-3.5 -74.3,-9.2 -72.2,-9.2 -72.2,-10.8 -70.548,-12.352 -57.551,-12.352 -55.753,-10.554 -55.753,6.047 -54.6,7.3 -48.8,12.8 -48.815,17.5 -47.723,17.517 -47.5,17.8 -47.44,17.8 -42.8,17.8 -42.4,17.4 -42.4,16.1 -41.6,15.3 -35.6,15.3 -29.9,9.6
GND on Top Layer "Top Layer-No Net" (solid, remove dead copper, pour order 20): -95.172,17.978 -96.772,17.978 -97.972,19.178 -98.572,19.178 -98.772,19.378 -98.772,21.578 -98.572,21.778 -98.072,21.778 -97.872,21.978 -97.872,23.478 -98.072,23.678 -98.172,23.678 -98.372,23.878 -98.372,25.578 -94.672,25.578 -94.672,28.378 -114.972,28.378 -117.066,30.478 -169.472,30.478 -169.472,-15.522 -124.472,-15.522 -124.472,-13.522 -98.472,-13.522 -98.472,-8.722 -99.172,-8.722 -99.172,-4.422 -99.972,-4.422 -99.972,5.478 -99.772,5.678 -92.072,13.278 -92.072,14.978 -95.172,14.978
GND on Top Layer "Top Layer-No Net" (solid, pour order 22): -91.5,-7.1 -91.5,-12.8 -70.8,-12.8 -72.8,-10.8 -72.8,-10.3 -72.8,-6.3 -76.3,-6.3 -76.3,-4.3 -76.5,-4.1 -78.7,-4.1 -78.7,-5.7 -81,-5.7 -81,-8.7 -84.1,-8.7 -84.1,-7.1
13V on Top Layer "Top Layer-No Net" (solid, pour order 16): -100.7,19.2 -101.5,19.2 -101.5,19.7 -102.5,19.7 -102.5,15.6 -102.7,15.4 -104.1,15.4 -104.1,13 -100.7,13
GND on Top Layer "Top Layer-No Net" (solid, pour order 21): -91.3,1.3 -91.3,-1 -88.7,-1 -88.7,-2.3 -82.7,-2.3 -82.7,-1.2 -80.2,-1.2 -80.1,-1.3 -80.1,1.3
13V on Top Layer "Top Layer-No Net" (solid, pour order 19): -91.3,3.5 -91.3,7.1 -83.2,7.1 -83.2,4.1 -82.5,3.4 -82.4,3.3 -79.2,3.3 -78.9,3 -78.9,-5.5 -82,-5.5 -82,-2.1 -79.9,-2.1 -79.9,1.5 -91.3,1.5
3.3V on Top Layer "Top Layer-No Net" (solid, pour order 18): -83.3,13.8 -83.3,12.5 -87.4,12.5 -87.4,9.2 -85.7,9.2 -85.7,7.3 -91.5,7.3 -91.5,-2.3 -95.7,-2.3 -95.7,-4.2 -99.8,-4.2 -99.8,5.3 -91.3,13.8
5V on Top Layer "Top Layer-No Net" (solid, pour order 17): -95.2,19.7 -96.8,19.7 -96.8,22.5 -96.6,22.7 -94.8,22.7 -94.6,22.9 -94.6,25.6 -87.3,25.6 -87.3,16 -91.9,16 -91.9,21.9 -92.1,22.1 -95,22.1 -95.2,21.9
GND on Top Layer "Top Layer-No Net" (solid, pour order 15): -96,-7.1 -92.4,-7.1 -92.2,-7.3 -92.2,-12.8 -98.9,-12.8 -98.9,-8.7 -96.2,-8.7 -96,-8.5
GND on Bottom Layer "Top Layer-No Net" (solid, pour order 28): -169.5,-15.5 -169.5,15.9 -143.5,15.9 -143.5,24.4 -122.3,24.4 -122.3,29.3 -87.2,29.3 -87.2,12.3 -77.7,12.3 -77.7,1.3 -75.5,1.3 -75.5,0.3 -71.3,0.3 -71.3,3.2 -74.4,3.2 -74.4,12.3 -73.3,12.3 -73.302,19.7 -68.642,19.76 -64.502,23.9 -53.302,23.9 -48.102,18.7 -40.302,18.7 -40,18.4 -40,14.9 -37.9,14.9 -32.3,9.3 -17.8,9.3 -17.8,14.76 -17.835,14.795 -17.831,14.8 -14.3,14.8 -14.3,18.7 -18.8,18.7 -18.8,30.498 -18.799,30.5 -5.276,30.5 -0.5,25.724 -0.5,0.5 -54.5,0.5 -54.5,-13.5 -124.5,-13.5 -124.5,-15.5
3.3V on Bottom Layer "Top Layer-No Net" (solid, remove dead copper, pour order 27): -21.594,18.69 -21.594,15.99 -19.194,15.99 -18.994,16.19 -18.995,30.49 -169.494,30.49 -169.5,18.7 -169.5,16.1 -158.294,16.09 -143.694,16.09 -143.694,24.59 -122.494,24.59 -122.494,29.49 -86.994,29.49 -86.994,12.49 -78.394,12.49 -77.494,11.59 -77.494,1.49 -75.294,1.49 -75.294,0.49 -71.494,0.49 -71.494,2.99 -74.694,2.99 -74.694,12.49 -73.514,12.49 -73.494,12.511 -73.5,18.9 -72.7,19.7 -71.3,19.7 -66.994,19.89 -62.694,24.19 -53.194,24.19 -47.894,18.89 -41.494,18.89 -41.294,18.69
5V on Bottom Layer "Top Layer-No Net" (solid, pour order 25): -39.8,15.1 -37.8,15.1 -32.2,9.5 -18,9.5 -18,14.4 -17.4,15 -14.5,15 -14.5,18.5 -18.8,18.5 -18.8,16.2 -19.2,15.8 -21.8,15.8 -21.8,18.5 -39.8,18.5
13V on Bottom Layer "Top Layer-No Net" (solid, pour order 26): -104.1,12.6 -104.1,14.9 -104.05,14.95 -100.7,14.95 -100.7,14.2 -92.8,6.3 -89.5,6.3 -89.5,3.8 -95.3,3.8 -95.8,4.3

## Other copper
Top Layer:
  rectangle net GND: -100.4,19 -98.8,22
  text "TOP" at -169.2,-15.2 h1.02
Bottom Layer:
  text "BOTTOM" at -163.5,-15.2 h1.02

## Silkscreen, mask and mechanical layers (free items; w line width, h text height)
Top Overlay:
  text "EXT/EXP" at -68.6,29.9 h1.02 r180
  text "EXP1" at -42.3,29.9 h1.02 r180
  text "EXP2" at -20.3,29.9 h1.02 r180
  text "UltiController rev. 2.1.2" at -126.4,-5 h1.02
  text "www.ultimaker.com/uc212" at -126.4,-6.651 h1.02
  text "CdB/BK/SW/RT" at -126.397,-8.427 h1.02
  text "DISPLAY" at -93.5,-12.7 h1.02
Bottom Overlay:
  drawing of 11 lines, arcs and shapes, not listed
  text "EXT/EXP" at -75.4,29.9 h1.02 r180
  text "EXP1" at -45.6,29.9 h1.02 r180
  text "EXP2" at -24,29.9 h1.02 r180
  text "1" at -76,15.9 h1.02
Mechanical 1:
  text ".Pcb_File_Name_No_Path" at 0,-0.5 h1.52
Mechanical 2:
  lines w0.1: -169.5,-15.5 -169.5,30.5 -5.276,30.5 -0.5,25.724 -0.5,0.5 -54.5,0.5 -54.5,-13.5 -124.5,-13.5 -124.5,-15.5 -169.5,-15.5 ; -167,-13 -167,28 -3,28 -3,3 -57,3 -57,-11 -127,-11 -127,-13 -167,-13
  lines w0.2: -143.05,-17.4 -143.05,-16 ; -90.073,-15.7 -90.073,-14 ; -27,0.6 -27,2 ; -170,-16 -124,-16 -124,-14 -54,-14 -54,0 0,0 0,26 -5,31 -170,31 -170,-16

## Dimensions
-170,-16 to -170,31 on Mechanical 2
0,1.4 to -54,-14 on Mechanical 2
0,0 to -170,-16 on Mechanical 2